# Altium PCB pcb4.PcbDoc
Units mil, origin at the board's own origin, x right, y up, seen from the top; angles counter-clockwise.
Board outline 4585 x 3565 mil, 4 copper layers (SIG/PWR1, GND1, SIG/PWR2, GND2), stack 23.756 mil thick; 45 components, 41 nets, 184 pads, 56 vias.
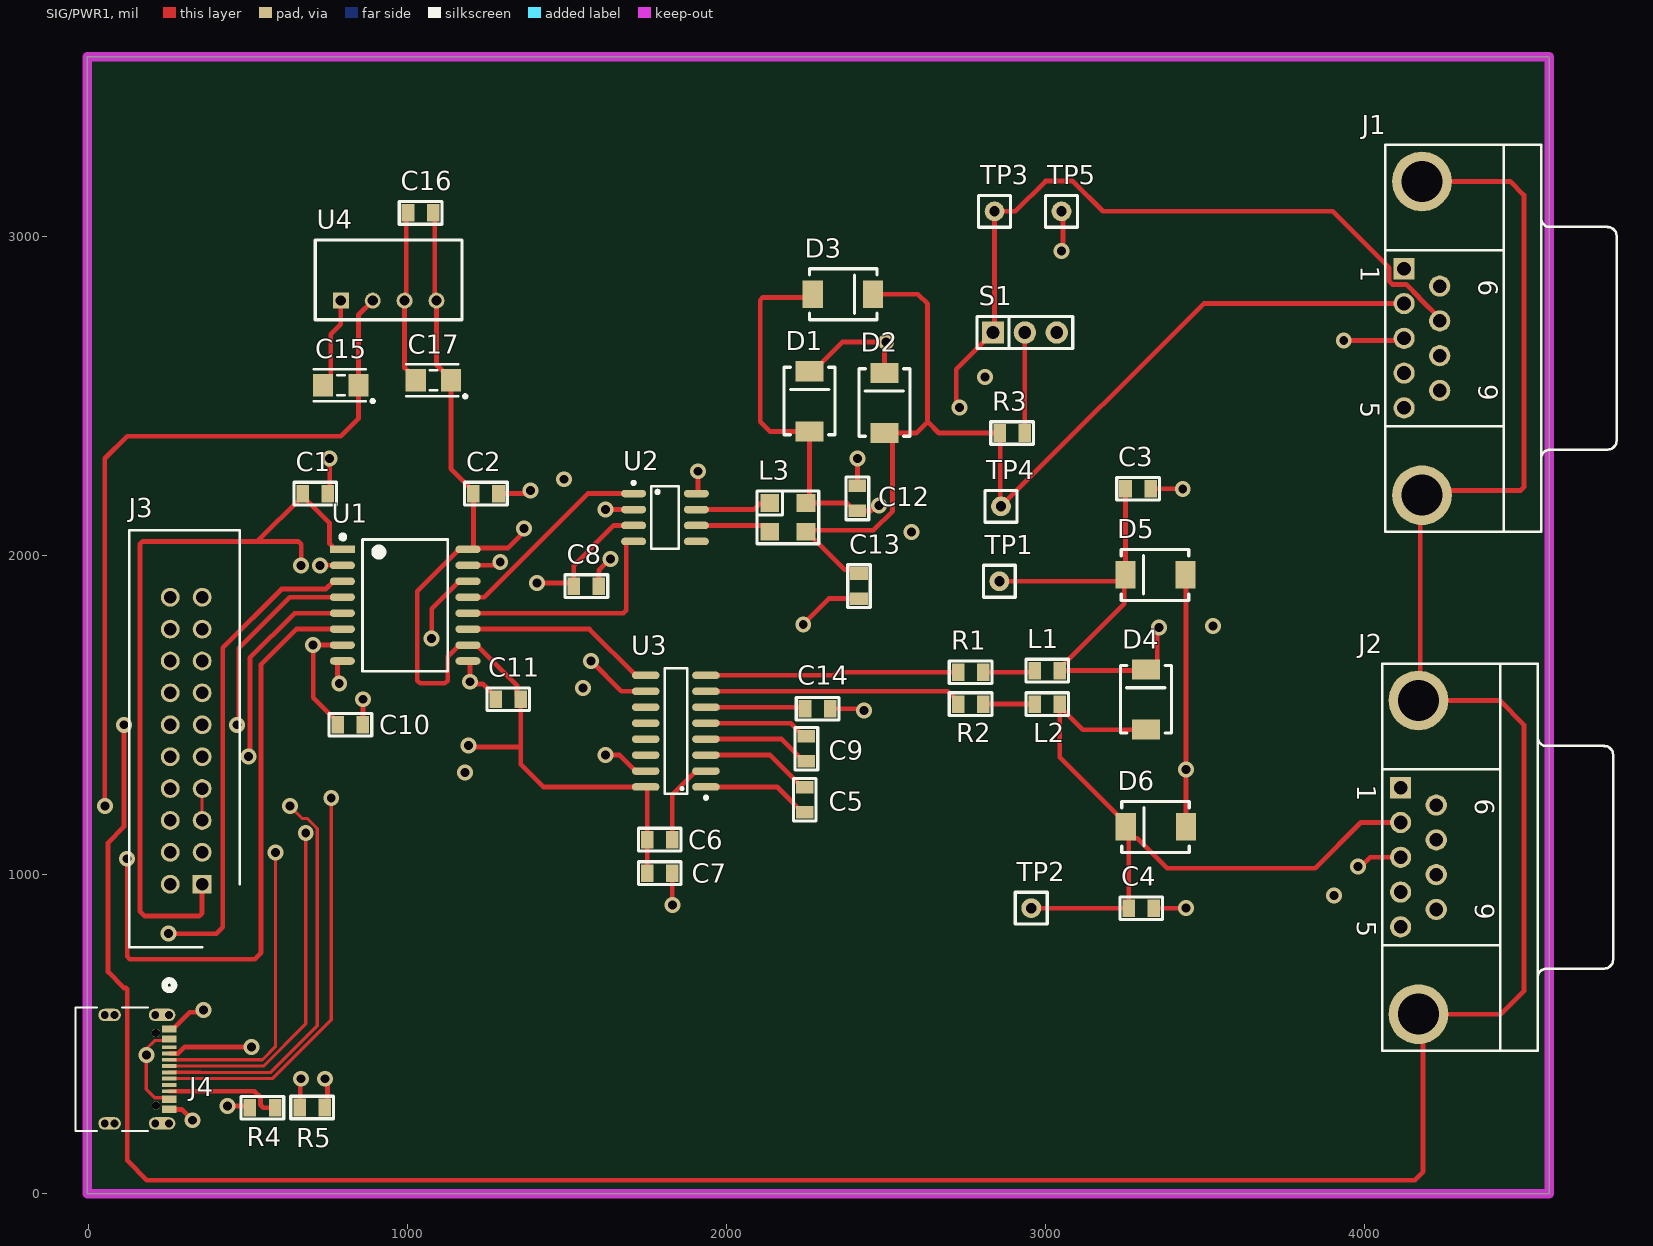
[diagram p0: SIG/PWR1 view]
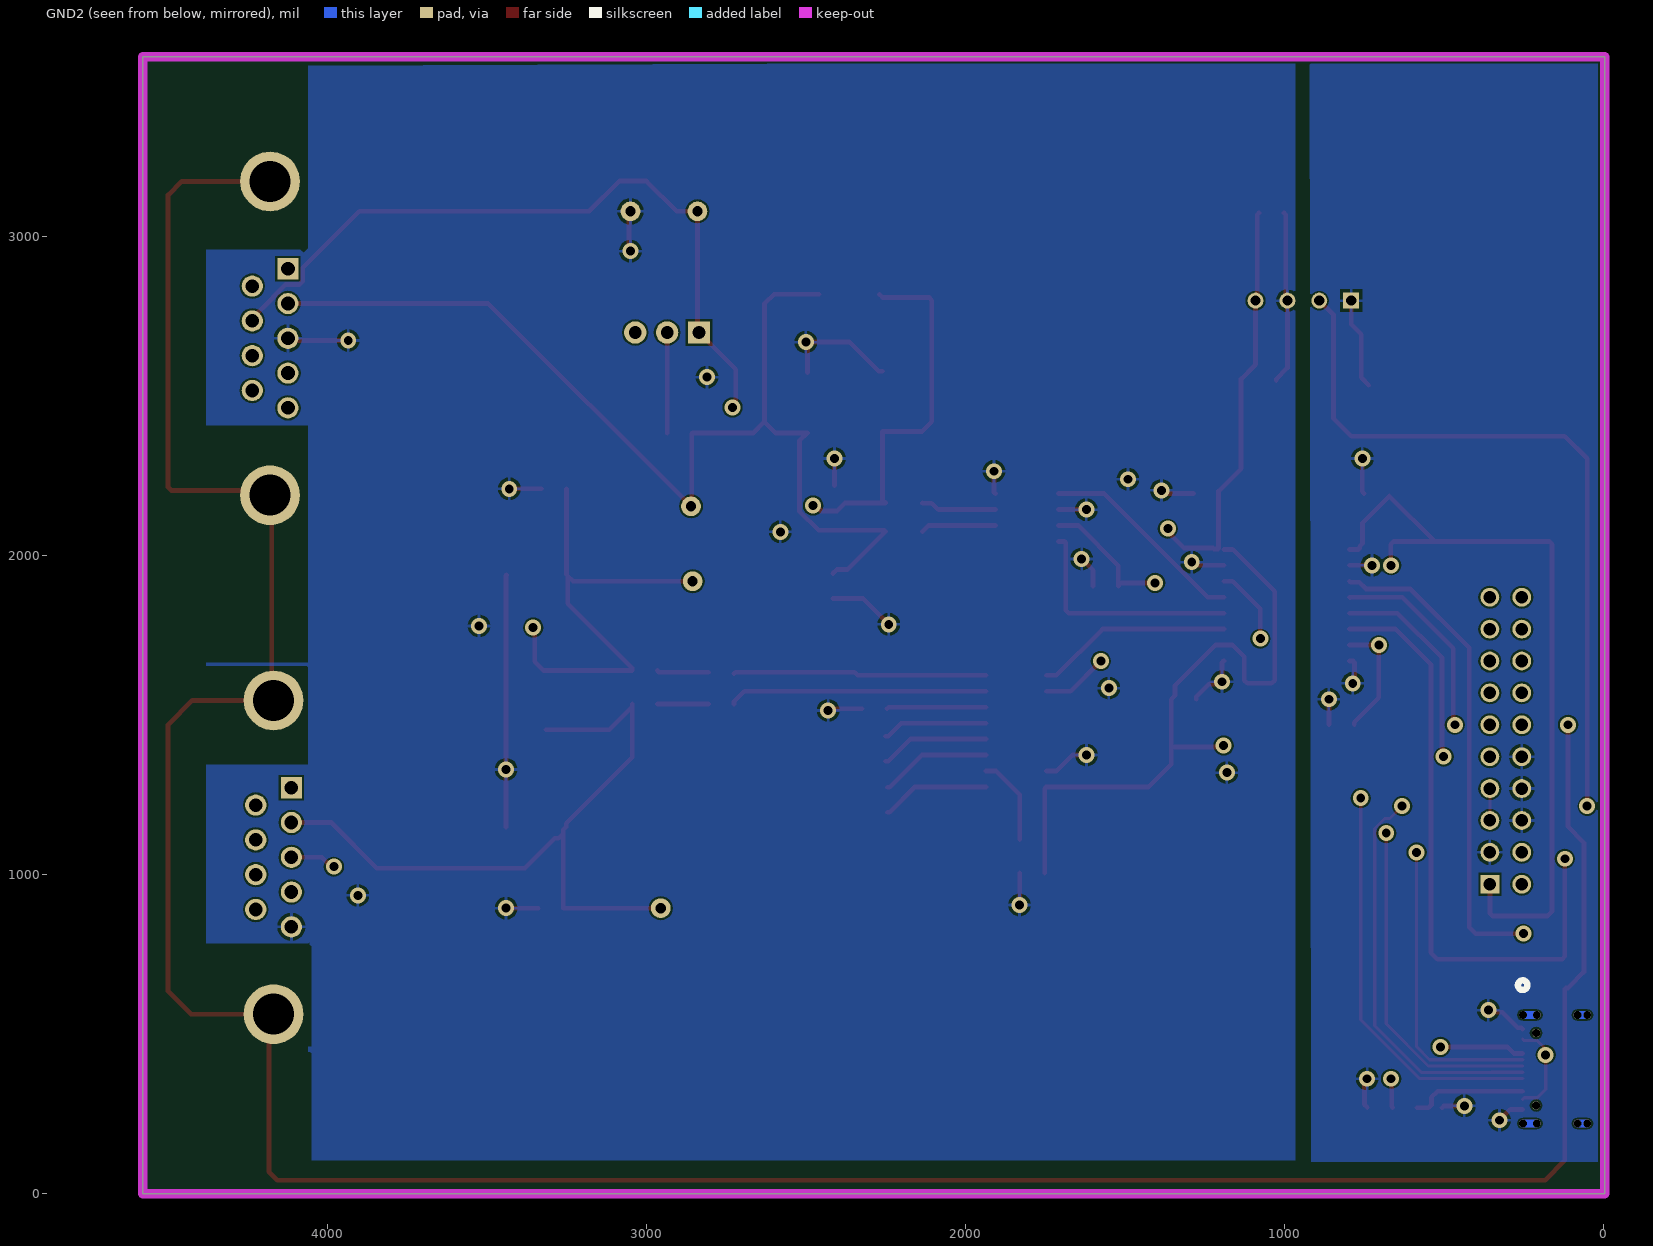
[diagram p1: GND2 view, seen from below]
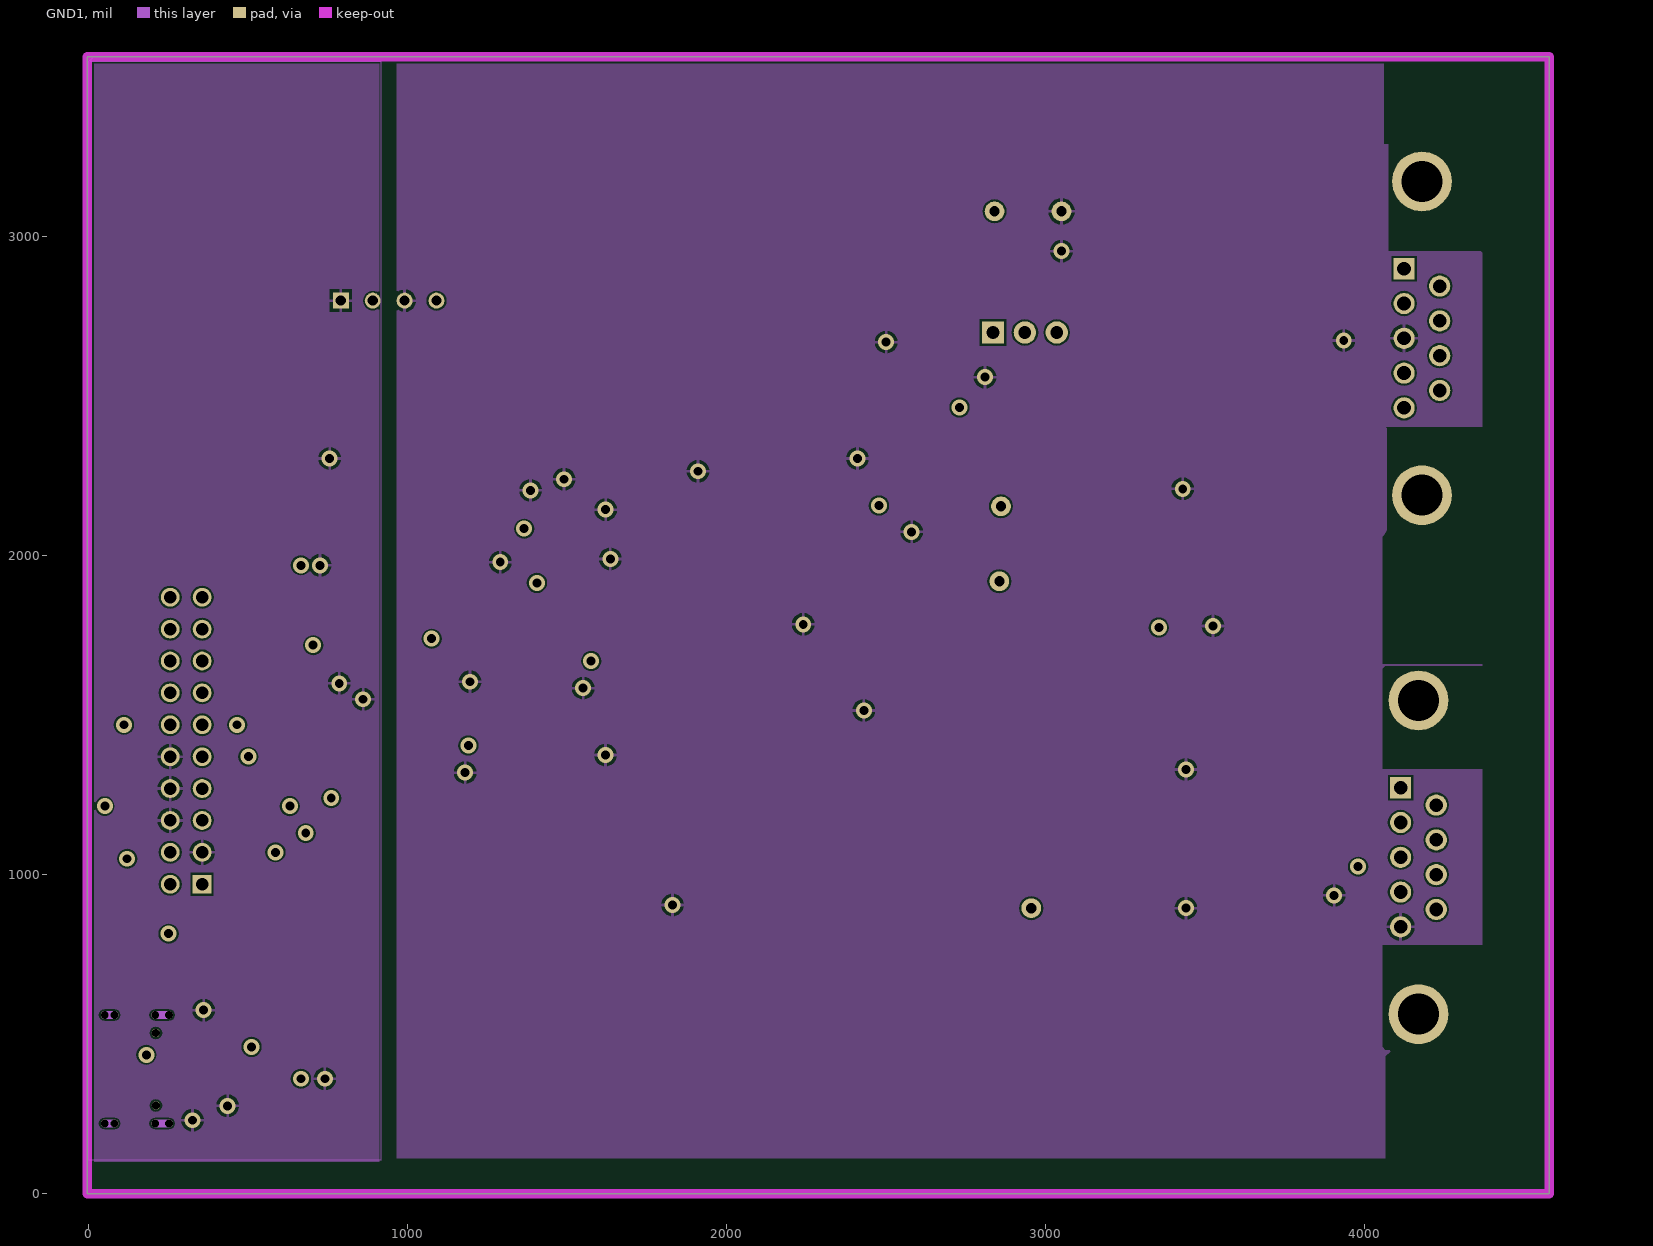
[diagram p2: GND1]
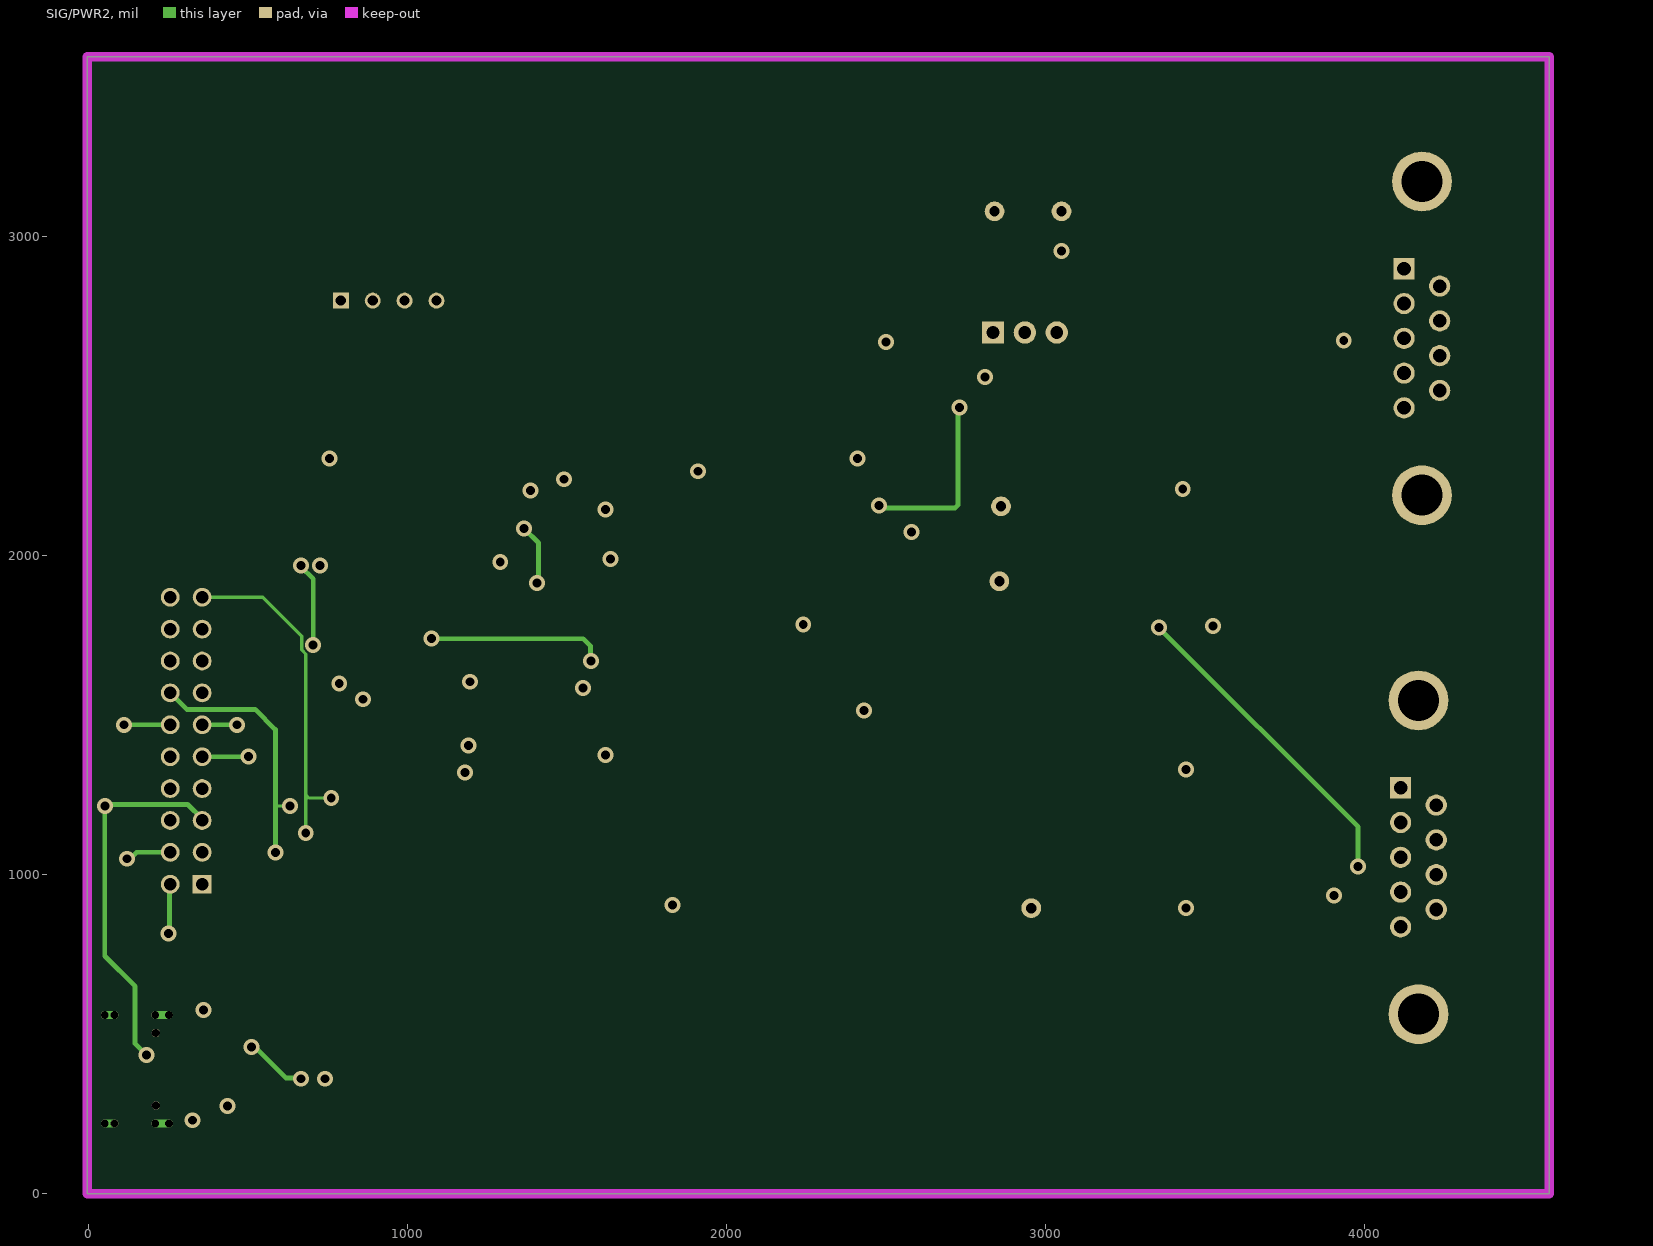
[diagram p3: SIG/PWR2]

## Layer stack, top to bottom
Top Solder: solder mask 0.4, Solder Resist, Dk 3.5
SIG/PWR1: signal copper 1.4
Dielectric 2: prepreg 2.8, PP-006, Dk 4.1
GND1: signal copper 1.378
Dielectric 1: dielectric 12.6, FR-4, Dk 4.8
SIG/PWR2: signal copper 1.378
Dielectric 3: prepreg 2.8, PP-006, Dk 4.1
GND2: signal copper 1.4
Bottom Solder: solder mask 0.4, Solder Resist, Dk 3.5

## Board outline
-5,0 4580,0 4580,3565 -5,3565

## Design rules (kind name [scope] priority, off if disabled: settings)
Clearance [All] p1: gap=6 ignorepadtopadclearanceinfootprint=FALSE
HoleSize [All] p1: absolutevalues=TRUE maxlimit=150 minlimit=1 maxpercent=80.000 minpercent=20.000
HoleToHoleClearance [All] p1: gap=6 allowstackedmicrovias=TRUE
MinimumSolderMaskSliver [All] p1: minsoldermaskwidth=0
PolygonConnect [All] p1: connectstyle=Relief reliefconductorwidth=10 reliefentries=4 polygonreliefangle="90 Angle" airgapwidth=10
RoutingVias [All] p1: holewidth=28 width=50 viastyle="Through Hole" minholewidth=28 minwidth=50 maxholewidth=28 maxwidth=50
SilkToSilkClearance [All] p1: silktosilkclearance=0
SilkToSolderMaskClearance [IsPad] p1: minsilkscreentomaskgap=0 clearancetoexposedcopper=TRUE
SolderMaskExpansion [All] p1: expansion=4 istentingtop=FALSE
Width Width_PWR [InNet('VDD')] p1: maxlimit=50 minlimit=10 preferedwidth=30
Width [All] p2: maxlimit=50 minlimit=10 preferedwidth=15
25 further rules are at their usual default settings.

## Components (designator, comment, footprint, x,y, rotation, side; value= is the part's Value field where it differs from the comment)
C1 "104" 0805 710,2195 r180 top
C2 "104" 0805 1245,2195 r0 top
C3 "331" 0805 3290,2210 r180 top
C4 "331" 0805 3300,895 r180 top
C5 "104" 0805 2245,1235 r270 top
C6 "104" 0805 1790,1110 r180 top
C7 "104" 0805 1790,1005 r0 top
C8 "104" 0805 1560,1905 r180 top
C9 "104" 0805 2250,1395 r270 top
C10 "104" 0805 820,1470 r0 top
C11 "104" 0805 1315,1550 r0 top
C12 "101" 0805 2410,2180 r270 top
C13 "101" 0805 2415,1905 r90 top
C14 "104" 0805 2285,1520 r0 top
C15 "22uf 16V" "1206 (钽电容)" 845,2535 r180 top value=475
C16 "104" 0805 1040,3075 r0 top
C17 "22uf 16V" "1206 (钽电容)" 1135.24,2550 r180 top value=106
D1 "P6KE5.0CA" DO214AA 2260,2390 r90 top
D2 "P6KE5.0CA" DO214AA 2495,2385 r90 top
D3 "P6KE6.8CA" DO214AA 2270,2820 r0 top
D4 "P6KE24CA" DO214AA 3315,1455 r90 top
D5 "P6KE15CA" DO214AA 3438.69,1940.26 r180 top
D6 "P6KE15CA" DO214AA 3440,1150 r180 top
J1 "D Connector 9" DSUB1.385-2H9 4554.02,2681.93 r270 top
J2 "D Connector 9" DSUB1.385-2H9 4543.11,1054.53 r270 top
J3 "HIF3FC-20PA-2.54DSA" SHDR20W56P254_2X10_3290X850X950P 355,970 r90 top
J4 "USB4105-GF-A" USB4105_GCT 115,390 r270 top
L1 "MMZ2012R601A" 0805 3005,1640 r180 top
L2 "MMZ2012R601A" 0805 3005,1535 r180 top
L3 "ACM3225-102-2P" ACM3225 2135,2165.55 r0 top
R1 "100R" 0805 2765,1635 r0 top
R2 "100R" 0805 2765,1535 r0 top
R3 "120R" 0805 2895,2385 r0 top
R4 "4.7k" 0805 544.37,268.94 r0 top
R5 "4.7k" 0805 700,270 r180 top
S1 "2.54排针黑色3P" SIP3 2835,2700 r0 top
TP1 "IV黄色测试点" TP 2855,1920 r0 top
TP2 "IV黄色测试点" TP 2955,895 r0 top
TP3 "IV黄色测试点" TP 2840,3080 r0 top
TP4 "IV黄色测试点" TP 2860,2155 r0 top
TP5 "IV黄色测试点" TP 3050,3080 r0 top
U1 "ISO7242CDW" SOIC16_L 795,2020 r0 top
U2 "TJA1050" sot96-1_n 1708.3,2195.3 r0 top
U3 "MAX232ESE" NSO16_N 1935,1275 r180 top
U4 "B0505S-1W" B0505S-1W 790,2950 r0 top

## Footprints (in the part's own frame and the unit in brackets; to place one, negate y for a bottom-side part, rotate by r counter-clockwise, add the part's x,y. Pads: shape width x height; smd on the part's side, far side on the other; paste and mask are expansions set on the pad)
0805 [mm]
  rect 1x1.4 smd: 1(-1,0) 2(1,0)
  silkscreen extent -1.7,-0.9 1.7,0.9
"1206 (钽电容)" [mm]
  rect 1.6x1.8 smd: 1(0,0) 2(2.8,0)
  silkscreen extent -1.27,-1.27 3.56,1.39
ACM3225 [mm]
  rect 1.5x1.4 smd: 1(0,0) 2(0,-2.3) 3(2.9,-2.3) 4(2.9,0)
  silkscreen extent -1.02,-3.25 3.9,0.96
B0505S-1W [mil]
  round 50 hole 32: 1(100,-150) 4(200,-150) 6(300,-150)
  rect 50x50 hole 32: 2(0,-150)
  silkscreen extent -80,-210 380,40
DO214AA [mm]
  rect 1.6x2.2 smd: 1(-0.007,0.007) 2(4.793,0.007)
  silkscreen extent -0.26,-2.03 5.11,2.04
DSUB1.385-2H9 [mm] "Connector; D Subminiature; 9 Position; Right Angle; Pitch 1.385 mm"
  rect 1.69x1.69 hole 1.09: 1(-5.54,-10.92)
  round 1.69 hole 1.09: 2(-2.77,-10.92) 3(0,-10.92) 4(2.77,-10.92) 5(5.54,-10.92) 6(-4.155,-8.08) 7(-1.385,-8.08) 8(1.385,-8.08) 9(4.155,-8.08)
  round 4.76 hole 3.26: 10(-12.495,-9.5) 11(12.495,-9.5)
  silkscreen extent -15.4,-12.4 15.4,6
NSO16_N [mm]
  oval 2.2x0.6 smd: 1(0,0) 2(0,-1.27) 3(0,-2.54) 4(0,-3.81) 5(0,-5.08) 6(0,-6.35) 7(0,-7.62) 8(0,-8.89) 9(4.8,-8.89) 10(4.8,-7.62) 11(4.8,-6.35) 12(4.8,-5.08) 13(4.8,-3.81) 14(4.8,-2.54) 15(4.8,-1.27) 16(4.8,0)
  silkscreen extent -0.12,-9.44 3.3,0.97
SHDR20W56P254_2X10_3290X850X950P [mm]
  rect 1.5x1.5 hole 1: 1(0,0)
  round 1.5 hole 1: 2(0,2.54) 3(2.54,0) 4(2.54,2.54) 5(5.08,0) 6(5.08,2.54) 7(7.62,0) 8(7.62,2.54) 9(10.16,0) 10(10.16,2.54) 11(12.7,0) 12(12.7,2.54) 13(15.24,0) 14(15.24,2.54) 15(17.78,0) 16(17.78,2.54) 17(20.32,0) 18(20.32,2.54) 19(22.86,0) 20(22.86,2.54)
  silkscreen extent -5.02,-2.98 28.18,5.82, body extent -5.02,-2.98 27.88,5.52, height 9.5
SIP3 [mil]
  rect 70x70 hole 40: 1(0,0)
  round 70 hole 40: 2(100,0) 3(200,0)
  silkscreen extent -50,-50 250,50
SOIC16_L [mm]
  rect 2x0.6 smd: 1(0,0)
  oval 2x0.6 smd: 2(0,-1.27) 3(0,-2.54) 4(0,-3.81) 5(0,-5.08) 6(0,-6.35) 7(0,-7.62) 8(0,-8.89) 9(10,-8.89) 10(10,-7.62) 11(10,-6.35) 12(10,-5.08) 13(10,-3.81) 14(10,-2.54) 15(10,-1.27) 16(10,0)
  silkscreen extent -0.15,-9.71 8.4,1.17
sot96-1_n [mm]
  oval 2x0.6 smd: 1(-0.004,-0.008) 2(-0.004,-1.278) 3(-0.004,-2.548) 4(-0.004,-3.818) 5(4.996,-3.818) 6(4.996,-2.548) 7(4.996,-1.278) 8(4.996,-0.008)
  silkscreen extent -0.13,-4.41 3.6,0.97
TP [mil]
  round 62 hole 32: 1(0,0)
  silkscreen extent -50,-50 50,50
USB4105_GCT [mil]
  oval 39x71 smd: 13(-170.08,-49.97) 14(170.08,-49.97)
  oval 39x83 smd: 15(-170.08,114.6) 16(170.08,114.6)
  round 26 hole 26 unplated: 17(-113.78,94.91) 18(113.78,94.91)
  rect 23x45 smd: A1-B12(-125.98,137.24) A4-B9(-94.49,137.24) B1-A12(125.98,137.24) B4-A9(94.49,137.24)
  rect 12x45 smd paste+0 mask+0: A5(-49.21,137.24) A6(-9.84,137.24) A7(9.84,137.24) A8(49.21,137.24) B5(68.9,137.24) B6(29.53,137.24) B7(-29.53,137.24) B8(-68.9,137.24)
  round 24 hole 24 unplated: S_1_H1(-170.08,-34.47) S_1_H2(-170.08,-65.47) S_2_H1(170.08,-34.47) S_2_H2(170.08,-65.47) S_3_H1(-170.08,136.1) S_3_H2(-170.08,93.1) S_4_H1(170.08,136.1) S_4_H2(170.08,93.1)
  Multi-Layer lines w24: 170.08,-65.47 170.08,-34.47 ; -170.08,-65.47 -170.08,-34.47 ; 170.08,93.1 170.08,136.1 ; -170.08,93.1 -170.08,136.1
  silkscreen extent -278,-157 194,152, body extent 0,0 10,10, height 10

## Part data
C1 C2 C5 C6 C7 C8 C9 C10 C11 C12 C13 C14 C16: library part Cap, "Capacitor", LatestRevisionDate=17-Jul-2002, LatestRevisionNote="Re-released for DXP Platform.", PackageReference=RAD-0.3, Published=8-Jun-2000, Publisher="Altium Limited"
  C16: ClassName=Power
C3 C4: library part 2KWC2.S01_100nf_54
C15 C17: library part "Cap Pol1", "Polarized Capacitor (Radial)", ClassName=Power, LatestRevisionDate=17-Jul-2002, LatestRevisionNote="Re-released for DXP Platform.", PackageReference=RB7.6-15, Published=8-Jun-2000, Publisher="Altium Limited"
D1 D2 D3 D4 D5 D6: library part "D ZENER2"
J1 J2: "Receptacle Assembly, 9 Position, Right Angle", PackageDocument=O, DatasheetDocument=1-Sep-1999, Gender=Receptacle, LatestRevisionDate=17-Jul-2002, LatestRevisionNote="Re-released for DXP Platform.", Orientation="Right Angle", PackageReference=788750, Positions=9, Published=15-Jun-2001, Publisher="Altium Limited"
J3: "Connector", Arrow Part Number=HIF3FC-20PA-2.54DSA(71), Manufacturer_Name=Hirose, Mouser Part Number=798-HIF3FC20PA254D71, Arrow Price/Stock=https://www.arrow.com/en/products/hif3fc-20pa-2.54dsa-71/hirose-electric?region=nac, Datasheet Link=https://www.hirose.com/product/en/products/HIF3FC/HIF3FC-20PA-2.54DSA%2871%29/, Height=9.5mm, Manufacturer_Part_Number=HIF3FC-20PA-2.54DSA(71), Mouser Price/Stock=https://www.mouser.co.uk/ProductDetail/Hirose-Connector/HIF3FC-20PA-254DSA71?qs=eDUdFcBPps3XO21sCrEU%252BQ%3D%3D, System=Connector
J4: "No Description Available", Mfr_Name="Global Connector Technology", Copyright="Copyright (C) 2022 Ultra Librarian. All rights reserved.", Digi-Key_Part_Number_1=2073-USB4105-GF-ACT-ND, Digi-Key_Part_Number_2=2073-USB4105-GF-ADKR-ND, Digi-Key_Part_Number_3=2073-USB4105-GF-ATR-ND, Manufacturer_Part_Number=USB4105-GF-A, RefDes=RefDes, Type=DEV
L1 L2: library part INDUCTOR
L3: library part T6
R1 R2 R3 R4 R5: library part Res2, "Resistor", LatestRevisionDate=17-Jul-2002, LatestRevisionNote="Re-released for DXP Platform.", PackageReference=AXIAL-0.4, Published=8-Jun-2000, Publisher="Altium Limited"
S1: library part SIP3
TP1 TP2 TP3 TP4 TP5: library part 测试点
U1: library part Component_1
U2: library part AT24C02, "U?"
U3: "+5V Powered, Multi-Channel RS-232 Driver/Receiver", Code_IPC=SOIC127P600-16, Code_JEDEC=MS-012-AC, ComponentLink1Description="Manufacturer Link", ComponentLink1URL=http://www.maxim-ic.com/, ComponentLink2Description=Datasheet, ComponentLink2URL=http://pdfserv.maxim-ic.com/en/ds/MAX220-MAX249.pdf, LatestRevisionDate=13-Apr-2006, LatestRevisionNote="IPC-7351 Footprint Added.", PackageDescription="16-Pin Small Outline Integrated Circuit 1.27 mm Pitch", PackageReference=NSO16, Published=16-Jan-2001, Publisher="Altium Limited"
U4: library part IB0505LS-W75, ClassName=Power

## Via types
v1: diameter 50, hole 28, SIG/PWR1 to GND2, 56 vias

## Nets (pads, with @x,y where several pads share a name; then routed paths per layer and width w, separated by ;. In a path a pad name is that pad's centre, name@x,y a point inside that pad or via, vN(x,y) a via of type N, cw(c..) or ccw(c..) an arc to the next point about the centre after c; other vN are vias at no path point)
AGND: C1.1 C10.2 C15.2 J3.3 J3.6 J3.8 J3.10 J4.A1-B12 J4.B1-A12 R4.1 R5.1 U1.2 U1.8 U4.2 | length 1024.2
  SIG/PWR1 w15: J4.B1-A12 290.98,264.02 v1(325,230) ; J4.A1-B12 256.24,519.98 267.24,519.98 315.56,568.3 353.3,568.3 v1(360,575) ; v1(435,275) 498.94,275 R4.1 ; v1(725,1970) U1.2 ; C15.2 758.76,2559 758.76,2694.92 790,2726.16 U4.2 ; R5.1 748.65,279.28 748.65,351.35 v1(740,360) ; C1.1 755,2200.63 v1(755,2305) ; v1(785,1600) 780,1605 780,1666.02 783.98,1670 U1.8 ; C10.2 859.37,1549.37 v1(860,1550)
D+5V: C15.1 J3.5 J3.7 J4.A4-B9 J4.B4-A9 U4.1 | length 3886.9
  SIG/PWR1 w10: J4.B4-A9 247.53,300.22 206.46,300.22 180,326.68 v1(180,435) 180,453.32 206.46,479.78 247.53,479.78 J4.A4-B9 ; J3.5 J3.7
  SIG/PWR1 w15: v1(50,1215) 50,2305 120,2375 790,2375 845,2430 845,2755 U4.1
  SIG/PWR2 w15: v1(180,435) 145,470 145,650 50,745 v1(50,1215) 55,1220 310,1220 355,1175 J3.5
"DSP-CAN RX": J3.9 U1.5 | length 805.1
  SIG/PWR1 w15: v1(500,1370) 505,1375 505,1680 645,1820 U1.5
  SIG/PWR2 w15: J3.9 v1(500,1370)
"DSP-CAN TX": J3.11 U1.4 | length 745.7
  SIG/PWR1 w15: v1(465,1470) 465,1475 470,1480 470,1710 630,1870 U1.4 U1.4@793.35,1868.35
  SIG/PWR2 w15: J3.11 v1(465,1470)
DSP-RS232_SCI_RXDA: J3.2 U1.3 | length 1673.2
  SIG/PWR1 w15: v1(250,815) 400,815 420,835 420,1711.48 604.26,1895.74 743.18,1895.74 764.62,1917.18 792.18,1917.18 U1.3
  SIG/PWR2 w15: v1(250,815) 252.5,817.5 252.5,967.5 J3.2
DSP-RS232_SCI_TXDA: J3.4 U1.6 | length 2087
  SIG/PWR1 w15: v1(120,1050) 120,743.79 128.79,735 520,735 540,755 540,1660 650,1770 U1.6
  SIG/PWR2 w15: v1(120,1050) 129.47,1050 149.47,1070 J3.4
GND_CAN: C2.2 C3.1 C4.1 C7.2 C8.1 C11.1 C12.1 C13.1 C14.2 C16.1 C17.2 D1.2 D2.2 D5.1 D6.1 J1.3 J2.5 TP5.1 U1.9 U1.15 U2.2 U2.8 U3.15 U4.4 | length 3519.3
  SIG/PWR1 w15: C16.1 995.32,3069.69 995.32,2805.31 U4.4 990,2588.94 1025,2553.94 C17.2 ; U1.9 1191.02,1670 1195,1666.02 v1(1195,1605) 1201.7,1598.3 1235.2,1598.3 1275.63,1557.87 C11.1 ; U1.15 1280,1970 1289.95,1979.95 v1(1289.95,1980.05) ; C2.2 1375,2195 v1(1385,2205) ; C8.1 1599.37,1954.37 v1(1635,1990) ; v1(1620,1375) 1664.53,1375 1714.53,1325 U3.15 ; v1(1620.51,2144.49) 1629.49,2144.49 1630,2145 U2.2 ; C7.2 1829.37,905.63 v1(1830,905) ; U2.8 1906.02,2195 1910,2198.98 v1(1910,2265) ; v1(2240,1785) 2320.63,1865.63 C13.1 ; D1.2 2271.55,2578.69 2362.86,2670 2489.48,2670 2494.74,2664.74 D2.2 ; C14.2 2410,1520 2415,1515 v1(2430,1515) ; C12.1 v1(2410,2305) ; v1(3050,2955) 3055,2960 3055,3075 TP5.1 ; C3.1 v1(3430,2210) ; C4.1 v1(3440,895) ; D5.1 3440,1938.98 3440,1150.02 D6.1 ; v1(3935,2675) 4117.17,2675 J1.3
  other v1: 3905,935 1180,1320 3440,1330 1550,1585 3525,1780 2580,2075 1490,2240 2810,2560 2500,2670
"ISO RS232 RX": U1.11 U3.9 | length 617.4
  SIG/PWR1 w15: U1.11 1569.53,1770 1714.53,1625 U3.9
"ISO RS232 TX": U1.14 U3.10 | length 1009
  SIG/PWR1 w15: v1(1075,1740) 1075,1833.86 1161.14,1920 U1.14 ; v1(1575,1670) 1670,1575 U3.10
  SIG/PWR2 w15: v1(1075,1740) 1550,1740 1572.5,1717.5 1572.5,1672.5 v1(1575,1670)
"J1-23-CAN H": C12.2 D1.1 D3.1 J1.7 L3.4 S1.1 TP3.1 | length 4080.9
  SIG/PWR1 w15: D3.1 2259.46,2810 2113.79,2810 2105,2801.21 2105,2420 2135.28,2389.72 D1.1 2259.74,2176.12 L3.4 2377.2,2165.55 2402.13,2140.63 C12.2 2452.49,2140.63 2469.42,2157.55 v1(2477.45,2157.55) ; v1(2730,2465) 2728.79,2465 2720,2473.79 2720,2585 S1.1 2840,2705 TP3.1 2905,3080 3000,3175 3085,3175 3180,3080 3900,3080 4077.33,2902.67 4077.33,2861.18 4087.71,2850.79 4130.43,2850.79 4170.86,2810.36 4170.86,2809.14 4235.91,2744.09 J1.7
  GND1 w15: S1.1 S1.1@2840,2705
  SIG/PWR2 w15: v1(2477.45,2157.55) 2485,2150 2716.21,2150 2725,2158.79 2725,2460 v1(2730,2465)
J1-28-TX: C4.2 D4.1 D6.2 J2.2 L2.1 TP2.1 | length 2292.6
  SIG/PWR1 w15: TP2.1 C4.2 D6.2@3260.63,1128.61 ; L2.1 L2.1@3044.37,1527.13 ; D4.1 3116.78,1454.72 L2.1@3044.37,1527.13 ; J2.2 3988.58,1163.58 3845,1020 3381.05,1020 3287.11,1113.93 3275.3,1113.93 D6.2@3260.63,1128.61 ; L2.1@3044.37,1527.13 3044.37,1368.49 3251.31,1161.55 D6.2 3260.63,1140.42 D6.2@3260.63,1128.61
J1-29-RX: C3.2 D4.2 D5.2 J2.3 L1.1 TP1.1 | length 2634.3
  SIG/PWR1 w15: TP1.1 3230,1920 D5.2@3246.31,1936.31 ; C3.2 3250.63,1940.63 D5.2 D5.2@3246.31,1936.31 ; v1(3355,1775) 3350,1770 3350,1667.69 3322.31,1640 L1.1 3044.37,1647.87 3246.31,1849.81 D5.2@3246.31,1936.31 ; v1(3980,1025) 3988.12,1025 4017.65,1054.53 J2.3
  SIG/PWR2 w15: v1(3355,1775) 3980,1150 v1(3980,1025)
"J1-35-CAN L": C13.2 D2.1 D3.2 J1.2 L3.3 R3.1 TP4.1 | length 3476.8
  SIG/PWR1 w15: C13.2 2402.81,1956.56 2369.59,1956.56 2251.14,2075 L3.3 2254.17,2080 2460,2080 2520,2140 2520,2360.72 2496,2384.72 D2.1 2594.72,2384.72 2630,2420 ; D3.2 2599.74,2820.26 2630,2790 2630,2420 ; J1.2 3495.98,2790.98 TP4.1 2857.82,2157.18 2857.82,2382.81 R3.1 2665,2385 2630,2420
MUSB_BZ: J3.20
MUSB_DM: J3.14 J4.A7 J4.B7 | length 3026.1
  SIG/PWR1 w10: J4.B7@251.76,420 J4.B7 544.53,419.53 585,460 v1(585,1070) ; J4.A7 349.29,380.16 349.45,380 570,380 716,526 716,1144.91 684.78,1176.13 668.87,1176.13 v1(630,1215)
  SIG/PWR2 w10: 585,1215 v1(630,1215)
  SIG/PWR2 w15: J3.14 306.71,1518.29 521.71,1518.29 585,1455 585,1215 v1(585,1070)
MUSB_DP: J3.19 J4.A6 J4.B6 | length 3429.5
  SIG/PWR1 w10: J4.B6 575.47,360.47 760,545 v1(760,1240) ; J4.A6 547.47,399.84 680,532.37 v1(680,1130)
  SIG/PWR2 w10: J3.19 545,1870 667.23,1747.77 667.23,1704.69 680,1691.92 680,1250 ; v1(680,1130) 680,1250 ; v1(760,1240) 690,1240 680,1250
MUSB_EN: J3.13
MUSB_FLT: J3.15
MUSB_ID: J3.16
MUSB_INT: J3.17
MUSB_VB: J3.18
NetC5_1: C5.1 U3.3 | length 351.7
  SIG/PWR1 w15: U3.3 2136.5,1375 2237.13,1274.37 C5.1
NetC5_2: C5.2 U3.1 | length 342.9
  SIG/PWR1 w15: U3.1 2157.76,1275 2237.13,1195.63 C5.2
NetC6_1: C6.1 U3.2 | length 277.2
  SIG/PWR1 w15: C6.1 1829.37,1250.87 1903.5,1325 U3.2
NetC9_1: C9.1 U3.5 | length 331.8
  SIG/PWR1 w15: U3.5 2201.5,1475 2242.13,1434.37 C9.1
NetC9_2: C9.2 U3.4 | length 344
  SIG/PWR1 w15: U3.4 1935.32,1425.32 2172.44,1425.32 2242.13,1355.63 C9.2
NetC14_1: C14.1 U3.6 | length 312.7
  SIG/PWR1 w15: U3.6 2240.63,1525 C14.1
NetJ4_A5: J4.A5 R5.2 | length 554.6
  SIG/PWR1 w15: J4.A5 252.42,439.4 280.33,439.4 300.93,460 v1(510,460) ; R5.2 662.82,272.19 662.82,357.82 v1(665,360)
  SIG/PWR2 w15: v1(510,460) 515,455 525,455 617.5,362.5 662.5,362.5 v1(665,360)
NetJ4_B5: J4.B5 R4.2 | length 367.4
  SIG/PWR1 w15: J4.B5 519.17,321.1 538.19,302.09 538.19,277.72 546.97,268.94 R4.2
NetL1_2: L1.2 R1.2 | length 163.3
  SIG/PWR1 w15: R1.2 2960.63,1635 L1.2
NetL2_2: L2.2 R2.2 | length 161.3
  SIG/PWR1 w15: R2.2 L2.2
NetL3_1: L3.1 U2.7 | length 238.5
  SIG/PWR1 w15: U2.7 2085,2145 2105,2165 2134.45,2165 L3.1
NetL3_2: L3.2 U2.6 | length 238.3
  SIG/PWR1 w15: U2.6 2115,2095 L3.2
NetR3_2: R3.2 S1.2 | length 315.3
  SIG/PWR1 w15: R3.2 2934.69,2385.32 2934.69,2699.69 S1.2
NetU1_12: U1.12 U2.4 | length 737
  SIG/PWR1 w15: U1.12 1676.21,1820 1685,1828.79 1685,2041.02 1688.98,2045 U2.4
NetU1_13: U1.13 U2.1 | length 654.1
  SIG/PWR1 w15: U1.13 1240,1870 1565,2195 U2.1
PE_GND: J1.10 J1.11 J2.10 J2.11 J3.12 | length 9951.6
  SIG/PWR1 w15: v1(110,1470) 110,1150 60,1100 60,695 110,645 116.21,645 120,641.21 120,103.79 181.81,41.97 4156.97,41.97 4183.79,68.79 4183.79,547.91 J2.11 4427.6,562.6 4500,635 4500,1470 4423.54,1546.46 J2.10 4174.55,1551.91 4174.55,2184.55 J1.11 4195,2205 4490,2205 4500,2215 4500,3131.21 4457.35,3173.86 J1.10
  SIG/PWR2 w15: v1(110,1470) J3.12
RS232R2: R1.1 U3.8 | length 796.8
  SIG/PWR1 w15: U3.8 2336.96,1625 2346.96,1635 2720.63,1635 R1.1@2725.63,1630
RS232T2: R2.1 U3.7 | length 811.8
  SIG/PWR1 w15: U3.7 2693.5,1575 2725.63,1542.87 R2.1
VCC_CAN: C2.1 C6.2 C7.1 C8.2 C11.2 C16.2 C17.1 U1.10 U1.16 U2.3 U3.16 U4.6 | length 3985.1
  SIG/PWR1 w15: C16.2 1084.69,3069.69 1084.69,2805.31 U4.6 1090,2599.17 1135.24,2553.94 C17.1 1135.24,2273.27 1205.63,2202.87 C2.1 1205.63,2023.98 1207.96,2021.65 1220.24,2021.65 1222.58,2023.98 1313.98,2023.98 1365,2075 v1(1365,2085) ; U1.16 1161.14,2020 1030,1888.86 1030,1608.79 1038.79,1600 1116.21,1600 1125,1608.79 1125,1683.86 1161.14,1720 U1.10 1216.26,1720 1342.18,1594.07 1342.18,1562.19 C11.2 1354.37,1400 ; v1(1190,1405) 1195,1400 1354.37,1400 ; v1(1405,1915) 1510.63,1915 C8.2 1520.63,1969.35 1646.28,2095 U2.3 ; C7.1 C6.2 1750.63,1271.02 1746.65,1275 1425,1275 1354.37,1345.63 1354.37,1400
  SIG/PWR2 w15: v1@1185,1400 v1(1190,1405) ; v1(1365,2085) 1410,2040 1410,1920 v1(1405,1915)
VDD: C1.2 C10.1 J3.1 U1.1 U1.7 | length 3102.3
  SIG/PWR1 w15: J3.1 355,878.79 346.21,870 175,870 160,885 160,2036.35 168.79,2045.14 528.65,2045.14 ; v1(665,1970) 665.63,1970.63 665.63,2036.21 656.85,2045 528.79,2045 528.65,2045.14 ; C10.1 780.63,1477.87 703.23,1555.27 v1(703.23,1719.6) 703.43,1719.8 794.8,1719.8 U1.7 ; U1.1 767.44,2020 763.13,2024.31 763.13,2030 754.34,2038.79 754.34,2103.41 670.63,2187.13 528.65,2045.14
  SIG/PWR2 w15: v1(665,1970) 665,1965.89 703.23,1927.66 v1(703.23,1719.6)
pads on no net: J1.1 J1.4 J1.5 J1.6 J1.8 J1.9 J2.1 J2.4 J2.6 J2.7 J2.8 J2.9 J4.13 J4.14 J4.15 J4.16 J4.17 J4.18 J4.A8 J4.B8 J4.S_1_H1 J4.S_1_H2 J4.S_2_H1 J4.S_2_H2 J4.S_3_H1 J4.S_3_H2 J4.S_4_H1 J4.S_4_H2 S1.3 U2.5 U3.11 U3.12 U3.13 U3.14

## Polygon pours and split planes (outlines as drawn)
no net on GND1 "NONET_L02_P002" (solid, remove dead copper, pour order 2): 5,3550 915,3550 915,105 0,105 0,3550 10,3560
AGND on GND1 "AGND_L02_P000" (solid, remove dead copper, pour order 0): 0,3550 910,3550 910,100 -5,100 -5,3550 5,3560
GND_CAN on GND1 "GND_CAN_L02_P001" (solid, remove dead copper, pour order 1): 965,3550 965,3440 965,110 4370,110 4370,3565 1030,3550 1020,3555
AGND on GND2 "AGND_L04_P004" (solid, remove dead copper, pour order 4): 0,3560 5,3555 920,3555 915.13,100 -15,100 -15,3560 -20,3565
GND_CAN on GND2 "GND_CAN_L04_P005" (solid, remove dead copper, pour order 5): 965,3550.86 965,105 4380,105 4380,3534.3 1244.1,3550.86 119.1,3550.86

## Keep-outs
Keep-Out Layer:
  lines w30: -5,0 4145,0 4580,0 4580,3565 -5,3565 -5,0

## Other copper
GND1:
  pour cut-out: 4065,430 4065,100 4350,100 4350,455 4090,455
  pour cut-out: 4060,3290 4375,3290 4375,3555 4065,3555 4060,3550
  pour cut-out: 4060,2065 4055,2060 4055,1660 4375,1660 4370,1665 4370,2075 4075,2075 4070,2080
  pour cut-out: 4055,460 4065,450 4370,450 4370,780 4055,780
  pour cut-out: 4375,1655 4065,1655 4055,1645 4055,1330 4370,1330 4375,1335
  pour cut-out: 4065,2405 4070,2400 4070,2080 4370,2080 4375,2075 4375,2405
  pour cut-out: 4075,3295 4075,2955 4370,2955 4375,2950 4375,3290 4070,3290
GND2:
  pour cut-out: 4430,65 4415,80 4060,80 4060,470 4055,475 4065,485 4410,485 4410,80 4430,60
  pour cut-out: 4055,445 4050,440 4050,105 4375,105 4375,445
  pour cut-out: 4050,440 4050,100 4375,100 4380,105 4375,110 4375,450 4060,450 4060,105 4390,105 4375,120 4375,445 4055,445
  pour cut-out: 4160.78,2070 4370,2070 4370,1675 4380,1665 4160,1665 4160,2069.22
  pour cut-out: 4155,2080 4150,2075 4060,2075 4060,1665 4160,1665 4160,2069.22 4160.78,2070
  pour cut-out: 4050,3555 4060,3545 4060,3290 4385,3290 4375,3300 4375,3565 4060,3565 4050,3575
  pour cut-out: 4060,785 4050,775 4050,460 4390,460 4395,465 4385,475 4385,785 4055,785 4050,790
  pour cut-out: 4065,1655 4060,1650 4060,1345 4385,1345 4390,1340 4395,1345 4395,1655
  pour cut-out: 4390,2410 4060,2410 4060,2075 4065,2070 4370,2070 4370,2405
  pour cut-out: 4060,3290 4060,2965 4075,2950 4085,2960 4385,2960 4385,3285 4390,3290

## Text inside footprints (layer, text, board x,y; h text height)
J1: Top Overlay "6" at 4358.15,2865.2 h59.06 r270; Top Overlay "9" at 4358.15,2538.03 h59.06 r270; Top Overlay "5" at 3988.07,2483.5 h59.06 r270; Top Overlay "1" at 3988.07,2909.88 h59.06 r270
J2: Top Overlay "6" at 4347.24,1237.8 h59.06 r270; Top Overlay "9" at 4347.24,910.63 h59.06 r270; Top Overlay "5" at 3977.17,856.1 h59.06 r270; Top Overlay "1" at 3977.17,1282.48 h59.06 r270